# Altium PCB MainSensorV1.PcbDoc (part 2 of 3)
Units mm, origin at the board's own origin, x right, y up, seen from the top; angles counter-clockwise.
Board outline 100 x 40.64 mm, 2 copper layers (Top Layer, Bottom Layer); 164 components, 84 nets, 408 pads, 582 vias.
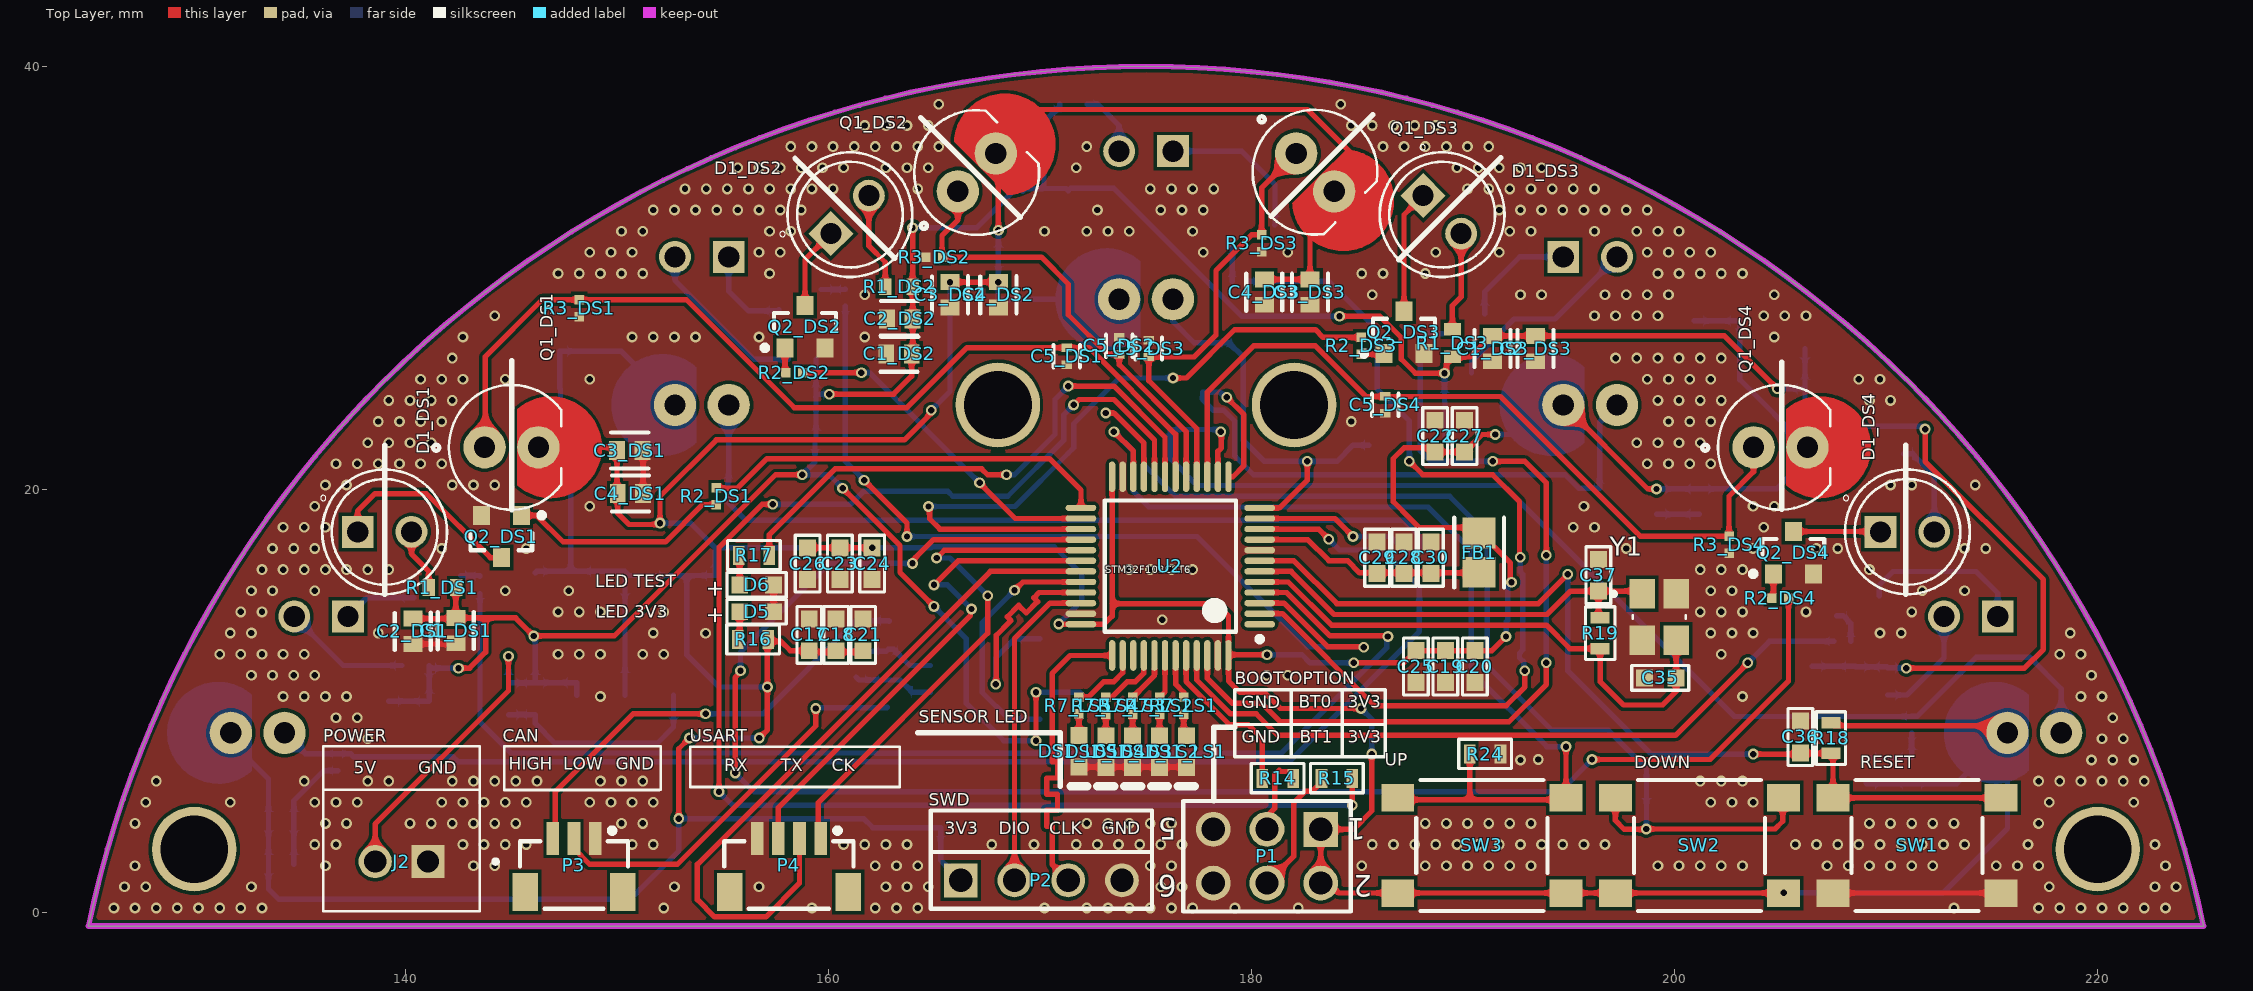
[diagram p0: Top Layer view]

## Part data (continued)
R3_DS1 R3_DS2 R3_DS3 R3_DS4 R6_LS1 R6_LS2 R6_LS3 R6_LS4 R6_LS5 R7_LS1 R7_LS2 R7_LS3 R7_LS4 R7_LS5: library part CMP-2000-07451-1, "Chip Resistor, 0 Ohm, 0.1 W, -55 to 155 degC, 0402 (1005 Metric), RoHS, Tape and Reel", Case Code (Imperial)=0402, Case Code (Metric)=1005, Manufacturer=Panasonic, Max Operating Temperature=155degC, Max Power Dissipation=100mW, Min Operating Temperature=-55degC, Package Description="2-Pin Surface Mount Device, Body 1 x 0.5 mm", Package Quantity=1, Package Reference=402, Resistance=0mOhm, Temperature Coefficient=600ppm/��C, Tolerance=5%, Voltage Rating=50V, Case/Package=0402, Composition=ThickFilm, Contact Plating=Tin, Datasheet URL=https://industrial.panasonic.com/cdbs/www-data/pdf/RDA0000/AOA0000C301.pdf, Datasheet Version=03/2015, Depth=0.5mm, Height=0.35mm, Lead Free=LeadFree, Length=1mm, Manufacturer URL=http://www.panasonic.com/, Military Standard=Not, Mount=SurfaceMount, Mounting Technology=SurfaceMount, Number of Terminations=2, Packaging=TapeandReel, Power Rating=100mW, Radiation Hardening=No, REACH SVHC=NoSVHC, RoHSCompliant=True, Termination=SMD/SMT, Voltage Rating (DC)=50V, Width=0.02inch
R14 R15: library part 0006031041, "RES, size 0603, 100 KOhm, 1/4 W", Manufacture  Name=OEM, Rated Power="1/4 W", Resistance="100 KOhm", Resistance Tolerance=+/-1%, ComponentLink1Description="Datasheet link", ComponentLink1URL=https://www.yageo.com/upload/media/product/productsearch/datasheet/rchip/PYu-SR_20105_RoHS_L_10.pdf, ComponentLink2Description="Supplier 1 URL", ComponentLink2URL=N/A, ComponentLink3Description="Supplier 2 URL", ComponentLink3URL=https://www.digikey.com/en/products/detail/yageo/SR0603FR-7T100KL/9373095, ComponentLink4Description="Supplier 3 URL", ComponentLink4URL=N/A, Manufacture  SN=OEM, Mounting Technology=SMT, Size=0603, Supplier 1 Name=Mouser, Supplier 1 SN=603-SR0603FR-7T100KL, Supplier 1 URL=https://www.mouser.vn/ProductDetail/YAGEO/SR0603FR-7T100KL?qs=sGAEpiMZZMvdGkrng054tz1y1XEHv7sNa%252BA%2F4WiDMf7aGw4zRBb%2FFQ%3D%3D, Supplier 2 Name=Digi-Key, Supplier 2 SN="YAG5821TR-ND YAG5821CT-ND YAG5821DKR-ND", Supplier 2 URL=https://www.digikey.com/en/products/detail/yageo/SR0603FR-7T100KL/9373095, Supplier 3 Name=thegioiic, Supplier 3 SN=N/A, Supplier 3 URL=N/A
R16 R17 R23 R24: library part 0006031021, "RES, size 0603, 1 KOhm, 1/4 W", Manufacture  Name=OEM, Rated Power="1/4 W", Resistance="1 KOhm", Resistance Tolerance=+/-1%, ComponentLink1Description="Datasheet link", ComponentLink1URL=https://www.yageo.com/upload/media/product/productsearch/datasheet/rchip/PYu-SR_20105_RoHS_L_10.pdf, ComponentLink2Description="Supplier 1 URL", ComponentLink2URL=N/A, ComponentLink3Description="Supplier 2 URL", ComponentLink3URL=https://www.digikey.com/en/products/detail/yageo/SR0603FR-7T1KL/9373103, ComponentLink4Description="Supplier 3 URL", ComponentLink4URL=N/A, Manufacture  SN=OEM, Mounting Technology=SMT, Size=0603, Supplier 1 Name=Mouser, Supplier 1 SN=71-RCS06031K00FKEA, Supplier 1 URL=https://www.mouser.vn/ProductDetail/Vishay-Dale/RCS06031K00FKEA?qs=sGAEpiMZZMvdGkrng054t9clqp6gtJJdzI9PGMrTQi4RTIuHToNahw%3D%3D, Supplier 2 Name=Digi-Key, Supplier 2 SN="YAG5829TR-ND YAG5829CT-ND YAG5829DKR-ND", Supplier 2 URL=https://www.digikey.com/en/products/detail/yageo/SR0603FR-7T1KL/9373103, Supplier 3 Name=thegioiic, Supplier 3 SN=N/A, Supplier 3 URL=N/A
R18: library part 0006031031, "RES, size 0603, 10 KOhm, 1/4 W", Manufacture  Name=OEM, Rated Power="1/4 W", Resistance="10 KOhm", Resistance Tolerance=+/-1%, ComponentLink1Description="Datasheet link", ComponentLink1URL=https://fscdn.rohm.com/en/products/databook/datasheet/passive/resistor/chip_resistor/esr-e.pdf, ComponentLink2Description="Supplier 1 URL", ComponentLink2URL=N/A, ComponentLink3Description="Supplier 2 URL", ComponentLink3URL=https://www.digikey.com/en/products/detail/rohm-semiconductor/ESR03EZPF1002/1983429, ComponentLink4Description="Supplier 3 URL", ComponentLink4URL=N/A, Manufacture  SN=OEM, Mounting Technology=SMT, Size=0603, Supplier 1 Name=Mouser, Supplier 1 SN=755-ESR03EZPF1002, Supplier 1 URL=https://www.mouser.vn/ProductDetail/ROHM-Semiconductor/ESR03EZPF1002?qs=sGAEpiMZZMvdGkrng054t67Efho1F8r6CDeAsqwFse8%3D, Supplier 2 Name=Digi-Key, Supplier 2 SN="RHM10KADTR-ND RHM10KADCT-ND RHM10KADDKR-ND", Supplier 2 URL=https://www.digikey.com/en/products/detail/rohm-semiconductor/ESR03EZPF1002/1983429, Supplier 3 Name=thegioiic, Supplier 3 SN=N/A, Supplier 3 URL=N/A
R19: library part 0006031055, "RES, size 0603, 1 MOhm, 1/4 W", Manufacture  Name=Panasonic, Manufacture  SN=ERJ-UP3J105V, Rated Power="1/4 W", Resistance Tolerance=+/-5%, ComponentLink1Description="Datasheet link", ComponentLink1URL=https://www.mouser.vn/datasheet/2/315/Panasonic_Resistors_Thick_Film_Anti_Sulf_Anti_Surg-1825099.pdf, ComponentLink2Description="Supplier 1 URL", ComponentLink2URL=N/A, ComponentLink3Description="Supplier 2 URL", ComponentLink3URL=https://www.digikey.com/en/products/detail/panasonic-electronic-components/ERJ-UP3J105V/12092177?s=N4IgTCBcDaIGxwOwFoCiAlAUsgqgBQGZMBGABgFYA1EAXQF8g, ComponentLink4Description="Supplier 3 URL", ComponentLink4URL=N/A, Mounting Technology=SMT, Resistance="1 MOhm", Size=0603, Supplier 1 Name=Mouser, Supplier 1 SN=667-ERJ-UP3J105V, Supplier 1 URL=https://www.mouser.vn/ProductDetail/Panasonic/ERJ-UP3J105V?qs=GedFDFLaBXGINFBXL6YStg%3D%3D, Supplier 2 Name=Digi-Key, Supplier 2 SN="10-ERJ-UP3J105VTR-ND - Tape & Reel (TR)", Supplier 2 URL=https://www.digikey.com/en/products/detail/panasonic-electronic-components/ERJ-UP3J105V/12092177?s=N4IgTCBcDaIGxwOwFoCiAlAUsgqgBQGZMBGABgFYA1EAXQF8g, Supplier 3 Name=thegioiic, Supplier 3 SN=N/A, Supplier 3 URL=N/A
R20 R22: library part 0006030001, "RES, size 0603, 0 Ohm, 1/4 W", Manufacture  Name=YAGEO, Manufacture  SN=AC0603FR-070RL, Rated Power="1/4 W", Resistance Tolerance=+/-1%, ComponentLink1Description="Datasheet link", ComponentLink1URL=https://www.mouser.com/datasheet/2/447/Yageo_06282023_ACseries-3224032.pdf, ComponentLink2Description="Supplier 1 URL", ComponentLink2URL=N/A, ComponentLink3Description="Supplier 2 URL", ComponentLink3URL=https://www.digikey.com/en/products/detail/yageo/ac0603fr-070rl/2827812, ComponentLink4Description="Supplier 3 URL", ComponentLink4URL=N/A, Mounting Technology=SMT, Resistance="0 Ohm", Size=0603, Supplier 1 Name=Mouser, Supplier 1 SN=603-AC0603FR-070RL, Supplier 1 URL=https://www.mouser.com/ProductDetail/YAGEO/AC0603FR-070RL?qs=sGAEpiMZZMtlubZbdhIBIOG3KwTtqrl%2FD2D%252BGuMCfoY%3D, Supplier 2 Name=Digi-Key, Supplier 2 SN=311-0.0LDTR-ND, Supplier 2 URL=https://www.digikey.com/en/products/detail/yageo/ac0603fr-070rl/2827812, Supplier 3 Name=thegioiic, Supplier 3 SN=N/A, Supplier 3 URL=https://www.thegioiic.com/dien-tro-0-ohm-0603-1-
R21: library part 0006031211, "RES, size 0603, 120 Ohm, 1/4 W", Manufacture  Name=OEM, Rated Power="1/4 W", Resistance Tolerance=+/-1%, ComponentLink1Description="Datasheet link", ComponentLink1URL=https://www.yageo.com/upload/media/product/productsearch/datasheet/rchip/PYu-SR_20105_RoHS_L_10.pdf, ComponentLink2Description="Supplier 1 URL", ComponentLink2URL=N/A, ComponentLink3Description="Supplier 2 URL", ComponentLink3URL=https://www.digikey.com/en/products/detail/yageo/SR0603FR-7T120RL/9373099, ComponentLink4Description="Supplier 3 URL", ComponentLink4URL=N/A, Manufacture  SN=OEM, Mounting Technology=SMT, Resistance="120 Ohm", Size=0603, Supplier 1 Name=Mouser, Supplier 1 SN=603-SR0603FR-7T120RL, Supplier 1 URL=https://www.mouser.vn/ProductDetail/YAGEO/SR0603FR-7T120RL?qs=sGAEpiMZZMvdGkrng054tz1y1XEHv7sNpzSbq0ZWZmOggb8s%252BZMxlg%3D%3D, Supplier 2 Name=Digi-Key, Supplier 2 SN="YAG5825TR-ND YAG5825CT-ND YAG5825DKR-ND", Supplier 2 URL=https://www.digikey.com/en/products/detail/yageo/SR0603FR-7T120RL/9373099, Supplier 3 Name=thegioiic, Supplier 3 SN=N/A, Supplier 3 URL=N/A
SW1 SW2 SW3: "WS-TASV SMT Tact Switch, L6 x W6 x H4.3mm, 260g, SPST-NO, 12V, 50mA", Manufacturer="Wurth Elektronik", Operating Temperature Max=85°C, Operating Temperature Min=-40°C, Rated Current=50mA, Rated Voltage=12VDC, Category="Tact Switches", Circuit=SPST-NO, ComponentLink2Description="Datasheet Link", ComponentLink2URL=https://www.we-online.com/redexpert/spec/430152043826?ad, Contact Material="Stainless Steel", Height=4.3mm, Length=6mm, Manufacturer Part Number=430152043826, Match Code=WS-TASV, Mount="Surface Mount", Operation Force=260g, Packaging="Tape and Reel", Supplier 1 Name=Mouser, Supplier 1 SN=710-430152043826, Supplier 1 URL=https://www.mouser.vn/ProductDetail/Wurth-Elektronik/430152043826?qs=wr8lucFkNMUjBcFj1giTsA%3D%3D, Supplier 2 Name=Digi-Key, Supplier 2 SN=732-6991-2-ND, Supplier 2 URL=https://www.digikey.com/en/products/detail/w%C3%BCrth-elektronik/430152043826/5208994, Supplier 3 Name=Thegioiic, Supplier 3 SN=N/A, Supplier 3 URL=https://www.thegioiic.com/nut-nhan-6x6mm-cao-4-3mm-4-chan-smd, Terminal Material="Copper Alloy", Terminal Plating=Silver, Washable=No, Width=6mm
U2: "ARM Microcontrollers - MCU 32BIT Cortex M3 64KB 20KB RAM 2X12 ADC", Manufacture SN=STM32F103C8T6TR, Manufacturer=STM, ComponentLink1Description=Datasheet, ComponentLink1URL=https://www.mouser.com/datasheet/2/389/stm32f103c8-1851025.pdf, ComponentLink2Description="Supplier 1 URL", ComponentLink2URL=https://www.mouser.com/ProductDetail/STMicroelectronics/STM32F103C8T6?qs=bhCVus9SdFtq6kqxsU5%2FDA%3D%3D, ComponentLink3Description="Supplier 2 URL", ComponentLink3URL=497-17666-2-ND, ComponentLink4Description="Supplier 3 URL", ComponentLink4URL=https://www.thegioiic.com/stm32f103c8t6-32-bit-arm-cortex-m3-microcontroller-72mhz-64kb-flash-48-lqfp, Footprint name=LQFP48, Pad Count=48, Part Number=STM32F103C8T6, Supplier 1 Name=Mouser, Supplier 1 SN=511-STM32F103C8T6, Supplier 1 URL=https://www.mouser.com/ProductDetail/STMicroelectronics/STM32F103C8T6?qs=bhCVus9SdFtq6kqxsU5%2FDA%3D%3D, Supplier 2 Name=Digi-Key, Supplier 2 SN=497-17666-2-ND, Supplier 2 URL=https://www.digikey.com/en/products/detail/stmicroelectronics/stm32f103c8t6tr/2122442, Supplier 3 Name=thegioiic, Supplier 3 SN=STM32F103C8T6, Supplier 3 URL=https://www.thegioiic.com/stm32f103c8t6-32-bit-arm-cortex-m3-microcontroller-72mhz-64kb-flash-48-lqfp
U3: library part AMS1117-3.3V, "AMS1117-3.3V, OUT 3.3V 1A.", Current Input Maximum=N/A, Current Output Maximum=1A, Manufacturer=AMS, Voltage Input Maximum=15V, Voltage Output=3.3V, ComponentLink1Description="Datasheet link", ComponentLink1URL=http://www.advanced-monolithic.com/pdf/ds1117.pdf, ComponentLink2Description="Supplier 1 URL", ComponentLink2URL=N/A, ComponentLink3Description="Supplier 2 URL", ComponentLink3URL=N/A, ComponentLink4Description="Supplier 3 URL", ComponentLink4URL=N/A, Manufacturer Part Number=N/A, Mounting Technology=SMD, Pad Count=4, Supplier 1 Name=Mouser, Supplier 1 SN=N/A, Supplier 1 URL=N/A, Supplier 2 Name=Digi-Key, Supplier 2 SN=N/A, Supplier 2 URL=N/A, Supplier 3 Name=thegioiic, Supplier 3 SN=N/A, Supplier 3 URL=https://www.thegioiic.com/ams1117-3-3v-ic-on-ap-3-3v-1a-sot-223
U4: library part TJA1050T/CM,118, "1/1 Transceiver Half CANbus 8-SO", Package="SO-8 NXP Semiconductors", Availability="In Stock", Check_prices=https://www.snapeda.com/parts/TJA1050T/CM,118/NXP%20USA%20Inc./view-part/304529/?ref=eda, MF="NXP USA", MP=TJA1050T/CM,118, Price=None, Purchase-URL=https://pricing.snapeda.com/search/part/TJA1050T/CM,118/?ref=eda, SnapEDA_Link=https://www.snapeda.com/parts/TJA1050T/CM,118/NXP%20USA%20Inc./view-part/304529/?ref=snap
Y1: "8 MHz Â±10ppm Crystal 8pF 500 Ohms 4-SMD, No Lead", Package="SMD-4 Abracon LLC", Availability="In Stock", Check_prices=https://www.snapeda.com/parts/ABM8AIG-8.000MHZ-8-V1R-T/Abracon+LLC/view-part/?ref=eda, MF="Abracon LLC", MP=ABM8AIG-8.000MHZ-8-V1R-T, Price=None, Purchase-URL=https://pricing.snapeda.com/search/part/ABM8AIG-8.000MHZ-8-V1R-T/?ref=eda, SnapEDA_Link=https://www.snapeda.com/parts/ABM8AIG-8.000MHZ-8-V1R-T/Abracon+LLC/view-part/?ref=snap

## Via types
v1: diameter 0.508, hole 0.3, Top Layer to Bottom Layer, tented both sides, 562 vias
v2: diameter 0.508, hole 0.3, Top Layer to Bottom Layer, 20 vias